# Altium PCB um3Supply.PcbDoc
Units mm, origin at the board's own origin, x right, y up, seen from the top; angles counter-clockwise.
Board outline 43 x 68 mm, 2 copper layers (Top Layer, Bottom Layer); 60 components, 30 nets, 167 pads, 9 vias.
Unrouted connection lines stored in the file: 38.
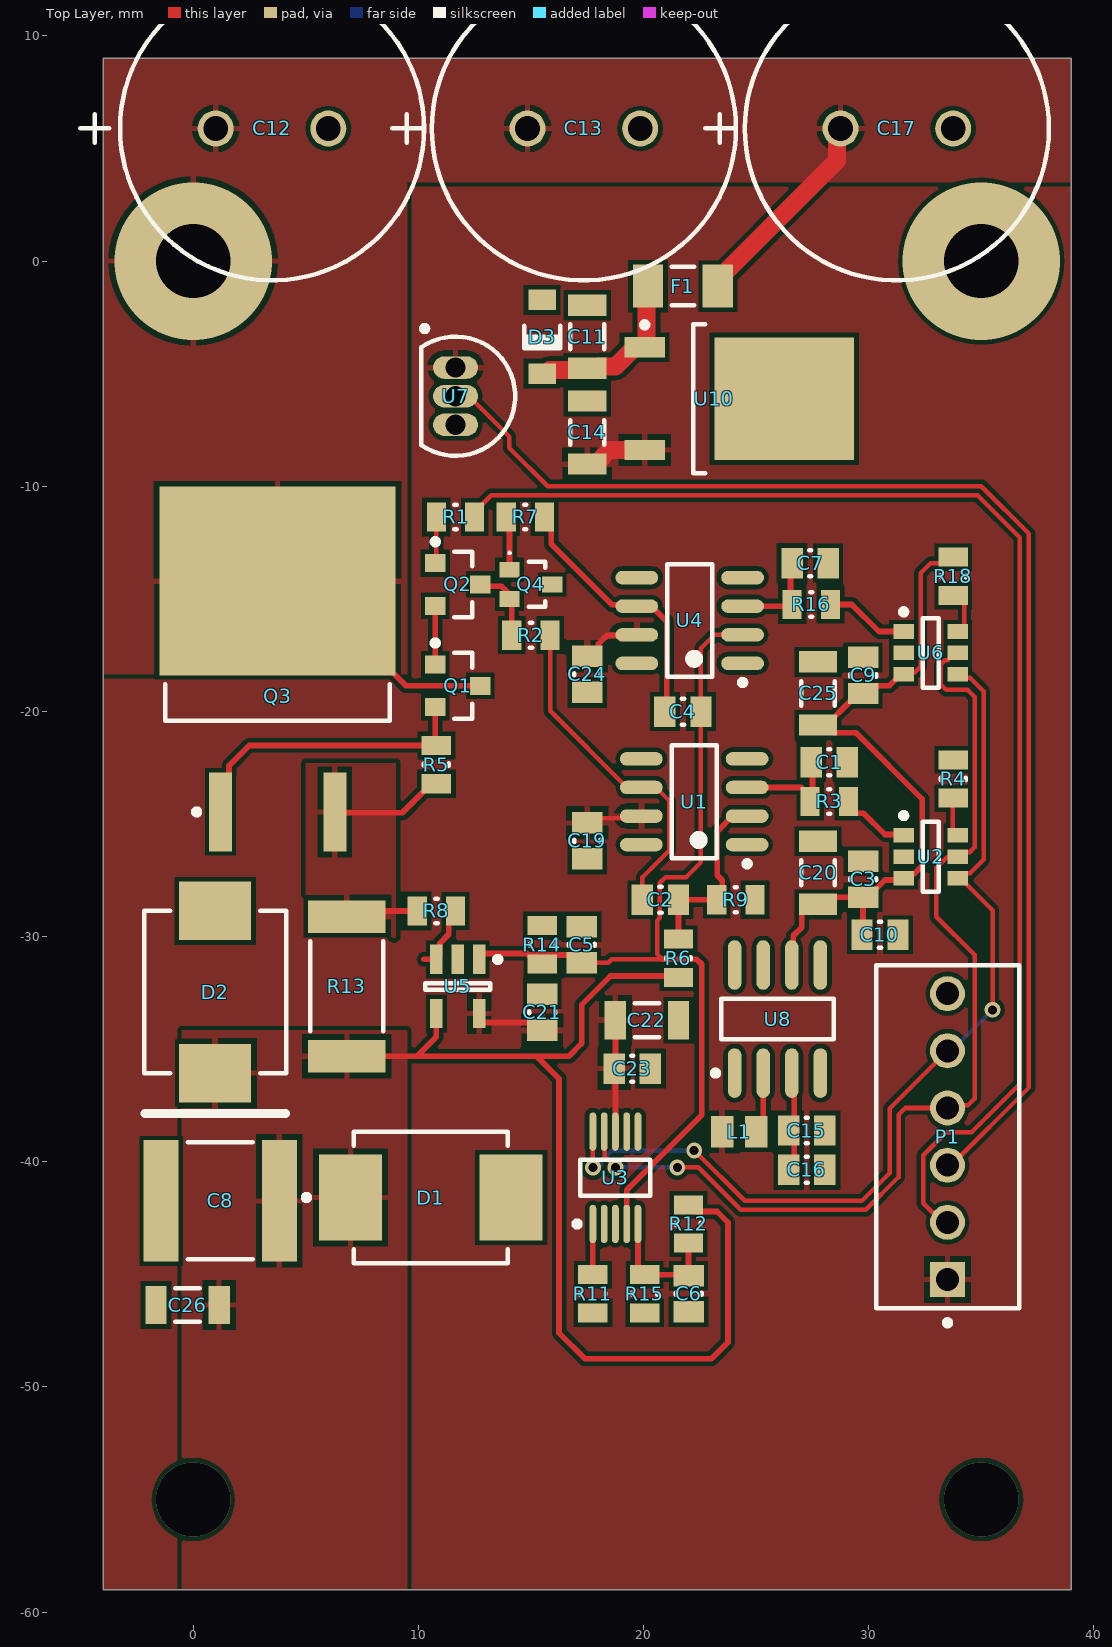
[diagram p0: Top Layer view]
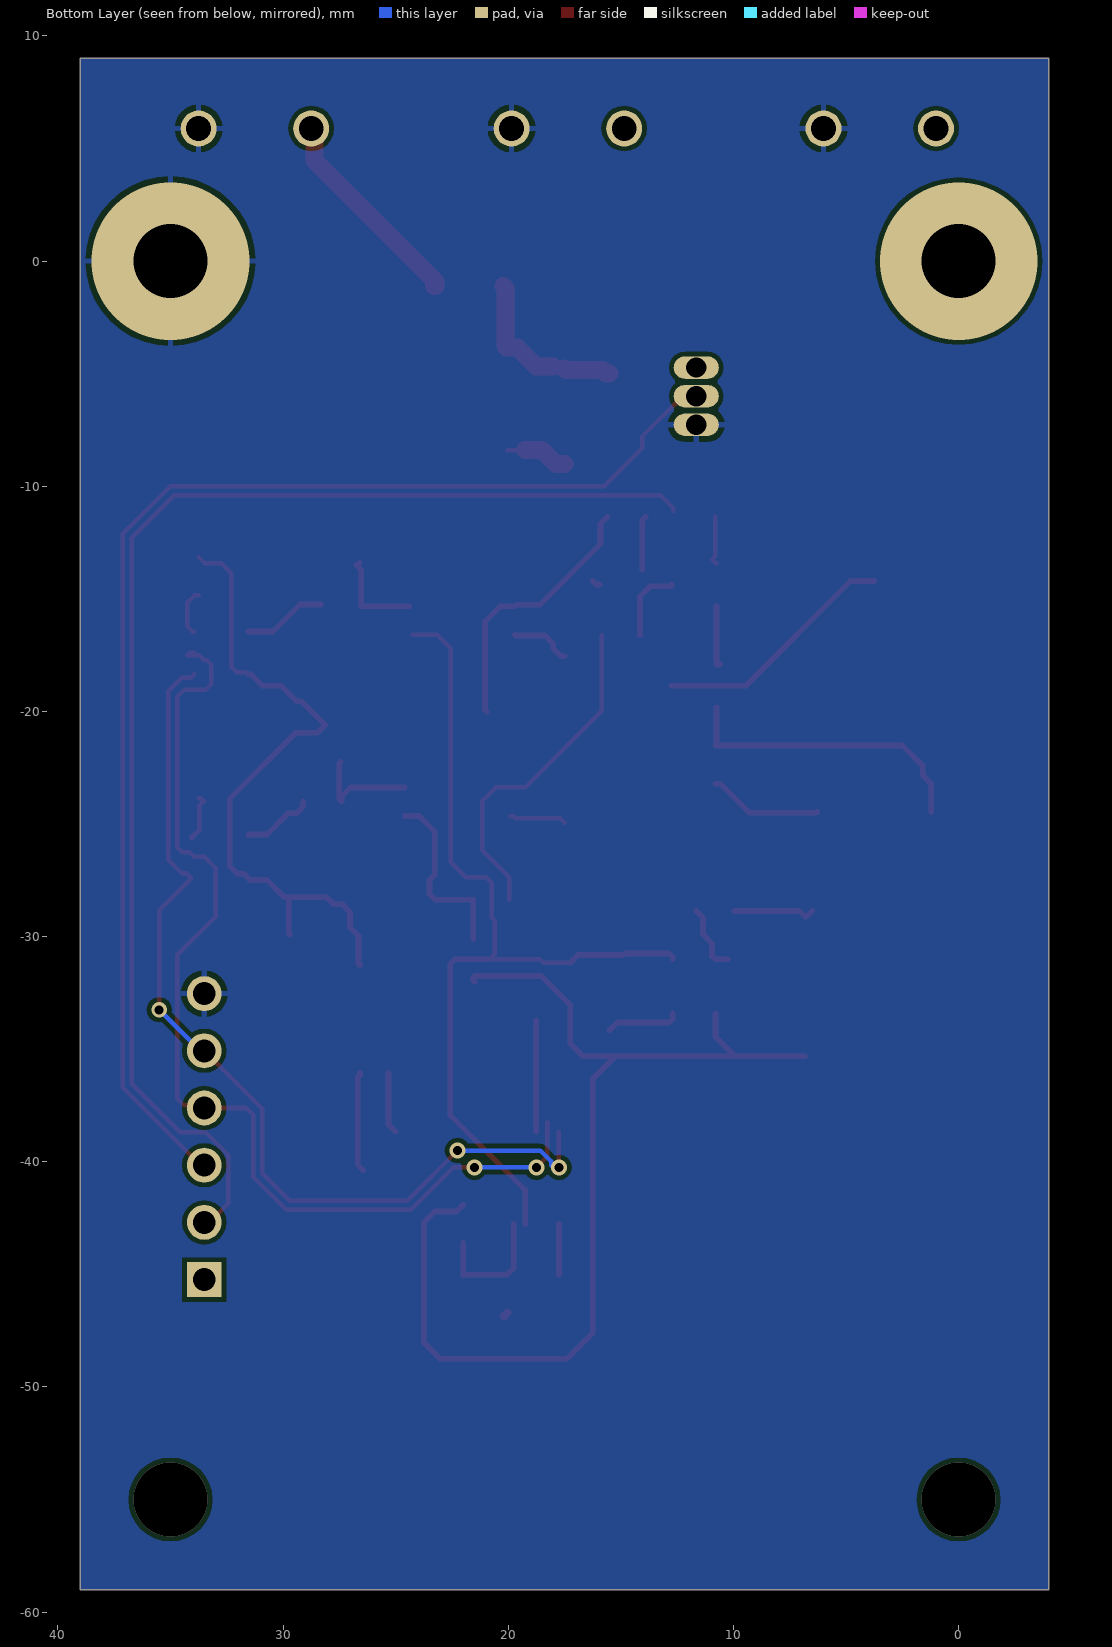
[diagram p1: Bottom Layer view, seen from below]

## Layer stack, top to bottom
Top Solder: solder mask 0.0102, Solder Resist, Dk 3.5
Top Layer: signal copper 0.0356
Dielectric 1: dielectric 0.32, FR-4, Dk 4.8
Bottom Layer: signal copper 0.0356
Bottom Solder: solder mask 0.0102, Solder Resist, Dk 3.5

## Board outline
-4,-59 39,-59 39,9 -4,9

## Design rules (kind name [scope] priority, off if disabled: settings)
Clearance [All] p1: gap=0.2 ignorepadtopadclearanceinfootprint=FALSE
PolygonConnect [All] p1: connectstyle=Relief reliefconductorwidth=0.254 reliefentries=4 polygonreliefangle="90 Angle" airgapwidth=0.254
RoomDefinition um3Supply [InComponentClass('um3Supply')] p1: confinementstyle=ConfineIn formatcopy=TRUE lockcomponents=FALSE outline 138.943,-96.729 578.871,-96.729 578.871,-76.409 138.943,-76.409
RoutingVias [All] p1: holewidth=0.4 width=0.7 viastyle="Through Hole" minholewidth=0.4 minwidth=0.7 maxholewidth=10 maxwidth=10
SolderMaskExpansion [All] p1: expansion=0.102
Width [All] p1: maxlimit=10 minlimit=0.2 preferedwidth=0.2
30 further rules are at their usual default settings.

## Components (designator, comment, footprint, x,y, rotation, side; value= is the part's Value field where it differs from the comment)
C1 "tbd" CAPC0805(2012)100_L 28.25,-22.25 r180 top value=1uF
C2 "tbd" CAPC0805(2012)100_L 20.75,-28.363 r0 top value=1uF
C3 "1uF" CAPC0805(2012)100_L 29.75,-27.453 r270 top
C4 "tbd" CAPC0805(2012)100_L 21.75,-20.013 r0 top value=1uF
C5 "tbd" CAPC0805(2012)100_L 17.25,-30.363 r90 top value=1uF
C6 "tbd" CAPC0805(2012)100_L 22,-45.863 r270 top value=1uF
C7 "tbd" CAPC0805(2012)100_L 27.4,-13.413 r180 top value=1uF
C8 "MOV" CAPC2220(5750)230_N 1.2,-41.738 r0 top value=22nF
C9 "1uF" CAPC0805(2012)100_L 29.75,-18.403 r270 top
C10 "1uF" CAPC0805(2012)100_L 30.5,-29.918 r180 top
C11 "CAP 10uF 10V 1206(3216)" CAPC1206(3216)130_L 17.5,-3.363 r270 top value=10uF
C12 "alum" PNSC-NF-A_V 3.5,5.887 r0 top
C13 "alum" PNSC-NF-A_V 17.35,5.887 r0 top
C14 "CAP 10uF 10V 1206(3216)" CAPC1206(3216)130_L 17.5,-7.613 r270 top value=10uF
C15 "1uF" CAPC0805(2012)100_L 27.25,-38.613 r180 top
C16 "1uF" CAPC0805(2012)100_L 27.25,-40.362 r180 top
C17 "alum" PNSC-NF-A_V 31.25,5.887 r0 top
C19 "1uF" CAPC0805(2012)100_L 17.5,-25.75 r90 top
C20 "CAP 10uF 10V 1206(3216)" CAPC1206(3216)130_L 27.75,-27.168 r270 top value=10uF
C21 "1uF" CAPC0805(2012)100_L 15.5,-33.363 r270 top
C22 "CAP 10uF 10V 1206(3216)" CAPC1206(3216)130_L 20.15,-33.713 r180 top value=10uF
C23 "1uF" CAPC0805(2012)100_L 19.5,-35.863 r180 top
C24 "1uF" CAPC0805(2012)100_L 17.5,-18.353 r90 top
C25 "CAP 10uF 10V 1206(3216)" CAPC1206(3216)130_L 27.75,-19.203 r270 top value=10uF
C26 "CAP 10uF 10V 1206(3216)" CAPC1206(3216)130_L -0.25,-46.363 r0 top value=10uF
D1 "MBRS4201T3" ONSC-SMC-2-403-03_V 10.55,-41.588 r0 top
D2 "SMCJ24A" FAIR-DO-214AB-2_V 0.975,-32.463 r270 top
D3 "MMSD4148T3G" ONSC-SOD123-2-425G-04_V 15.5,-3.363 r90 top
F1 "PTC" RESC1206(3216)_M 21.75,-1.113 r0 top value="499000.00 Ohm"
L1 "FBMJ2125HM210NT" INDC2013X105X50LL20T30 24.25,-38.663 r180 top
P1 "22-23-2061" MOLX-22-23-2061_V 33.5,-38.883 r90 top
Q1 "BC817" ONSC-SOT-23-3-318-08_V 11.75,-18.863 r0 top
Q2 "BC817" ONSC-SOT-23-3-318-08_V 11.75,-14.363 r0 top
Q3 "STB13007DT4" ONSC-D2PAK-3-418B-04_V 3.75,-18.113 r90 top
Q4 "BC807" ONSC-SC-70-3-419-04_V 15,-14.363 r0 top
R1 "220" RESC0805(2012)_L 11.65,-11.363 r0 top value="100.00 Ohm"
R2 "220" RESC0805(2012)_L 15,-16.613 r180 top value="100.00 Ohm"
R3 "220" RESC0805(2012)_L 28.25,-24 r180 top value="100.00 Ohm"
R4 "tbd" RESC0805(2012)_L 33.75,-23 r270 top value="100.00 Ohm"
R5 "tbd" RESC0805(2012)_L 10.8,-22.363 r90 top value="100.00 Ohm"
R6 "tbd" RESC0805(2012)_L 21.55,-30.963 r270 top value="100.00 Ohm"
R7 "220" RESC0805(2012)_L 14.75,-11.363 r0 top value="100.00 Ohm"
R8 "tbd" RESC0805(2012)_L 10.8,-28.863 r0 top value="100.00 Ohm"
R9 "tbd" RESC0805(2012)_L 24.1,-28.363 r0 top value="100.00 Ohm"
R11 "tbd" RESC0805(2012)_L 17.75,-45.863 r90 top value="100.00 Ohm"
R12 "tbd" RESC0805(2012)_L 22,-42.763 r90 top value="100.00 Ohm"
R13 "0.010Ohm 3W" RESC2512(6432)_M 6.825,-32.213 r90 top value="8660000.00 Ohm"
R14 "tbd" RESC0805(2012)_L 15.5,-30.363 r270 top value="100.00 Ohm"
R15 "tbd" RESC0805(2012)_L 20.05,-45.863 r90 top value="100.00 Ohm"
R16 "220" RESC0805(2012)_L 27.45,-15.25 r180 top value="100.00 Ohm"
R18 "tbd" RESC0805(2012)_L 33.75,-14 r270 top value="100.00 Ohm"
U1 "ADA4891" ADI-R-8_L 22.25,-24.013 r180 top
U2 "MCP4725A2T-E/CH" SOT-23-CH6_L 32.75,-26.453 r0 top
U3 "ADS1013IDGST" TI-DGS10_N 18.75,-40.713 r90 top
U4 "ADA4891" ADI-R-8_L 22.05,-15.963 r180 top
U5 "LT6106" LT-S5-5-TSOT-23_N 11.75,-32.213 r270 top
U6 "MCP4725A2T-E/CH" SOT-23-CH6_L 32.75,-17.403 r0 top
U7 "MCP9700-E/TO" TO-92-TO3 11.65,-6 r180 top
U8 "REF195GSZ" ADI-R-8_N 25.95,-33.663 r90 top
U10 "L78M05CDT-TR" TO-252_L 24.25,-6.112 r0 top

## Footprints (in the part's own frame and the unit in brackets; to place one, negate y for a bottom-side part, rotate by r counter-clockwise, add the part's x,y. Pads: shape width x height; smd on the part's side, far side on the other; paste and mask are expansions set on the pad)
ADI-R-8_L [mm] "SOIC, 8-Leads, Body 4.9x3.9mm, Pitch 1.27mm, IPC High Density"
  oval 1.9x0.6 smd: 1(-2.35,1.905) 2(-2.35,0.635) 3(-2.35,-0.635) 4(-2.35,-1.905) 5(2.35,-1.905) 6(2.35,-0.635) 7(2.35,0.635) 8(2.35,1.905)
  silkscreen extent -2.48,-2.5 1,2.88, body extent -2,-2.5 2,2.5, height 1.75
ADI-R-8_N [mm] "SOIC, 8-Leads, Body 4.9x3.9mm, Pitch 1.27mm, IPC Medium Density"
  oval 2.2x0.6 smd: 1(-2.4,1.905) 2(-2.4,0.635) 3(-2.4,-0.635) 4(-2.4,-1.905) 5(2.4,-1.905) 6(2.4,-0.635) 7(2.4,0.635) 8(2.4,1.905)
  silkscreen extent -2.52,-2.5 0.9,2.88, body extent -2,-2.5 2,2.5, height 1.75
CAPC0805(2012)100_L [mm] "Chip Capacitor, Body 2.0x1.2mm, Height 1.0mm, IPC High Density"
  rect 0.95x1.35 smd: 1(-0.8,0) 2(0.8,0)
  silkscreen extent -0.05,-0.58 0.05,0.58, body extent -1.1,-0.72 1.1,0.72, height 1
CAPC1206(3216)130_L [mm] "Chip Capacitor, Body 3.2x1.6mm, Height 1.3mm, IPC High Density"
  rect 0.95x1.7 smd: 1(-1.4,0) 2(1.4,0)
  silkscreen extent -0.55,-0.75 0.55,0.75, body extent -1.7,-0.9 1.7,0.9, height 1.3
CAPC2220(5750)230_N [mm] "Chip Capacitor, Body 5.7x5.0mm, Height 2.3mm, IPC Medium Density"
  rect 1.55x5.4 smd: 1(-2.625,0) 2(2.625,0)
  silkscreen extent -1.45,-2.6 1.45,2.6, body extent -3.05,-2.7 3.05,2.7, height 2.3
FAIR-DO-214AB-2_V [mm] "Molded Diode, 2-Leads, Body 7.15x6.25mm"
  rect 2.6x3.2 smd: 1(-3.6,0) 2(3.6,0)
  silkscreen extent -3.6,-3.15 5.4,3.15, body extent -3.79,-3.13 3.79,3.13, height 2.65
INDC2013X105X50LL20T30 [mm] "Chip Inductor, 2-Leads, Body 2.2x1.45mm, IPC High Density"
  rect 0.99x1.39 smd: 1(-0.755,0) 2(0.755,0)
  body extent -1.1,-0.72 1.1,0.72, height 1.05
LT-S5-5-TSOT-23_N [mm] "SOT23, 5-Leads, Body 2.90x1.63mm, Pitch 0.95mm, IPC Medium Density"
  rect 1.3x0.55 smd: 1(-1.2,0.95) 2(-1.2,0) 3(-1.2,-0.95) 4(1.2,-0.95) 5(1.2,0.95)
  silkscreen extent -1.32,-1.45 0.15,1.9, body extent -0.87,-1.45 0.87,1.45, height 0.01
MOLX-22-23-2061_V [mm] "THD, 6-Leads, Body 15.24x6.35mm, Pitch 2.54mm"
  rect 1.55x1.55 hole 1.02: 1(-6.35,0)
  round 1.55 hole 1.02: 2(-3.81,0) 3(-1.27,0) 4(1.27,0) 5(3.81,0) 6(6.35,0)
  silkscreen extent -8.39,-3.18 7.62,3.18, body extent -7.54,-3.25 7.54,3.1, height 10.67
ONSC-D2PAK-3-418B-04_V [mm] "DPAK, 3-Leads, Body 9.97x9.145mm, Pitch 2.54mm"
  rect 3.504x1.016 smd: 1(-6.35,2.54) 3(-6.35,-2.54)
  rect 8.38x10.49 smd: 4(3.9,0)
  silkscreen extent -6.47,-4.98 -0.69,4.98, body extent -2.3,-4.98 6.85,4.98, height 4.83
ONSC-SC-70-3-419-04_V [mm] "SOT23, 3-Leads, Body 2x1.25mm, Pitch 0.65mm"
  rect 0.9x0.7 smd: 1(-0.95,0.65) 2(-0.95,-0.65) 3(0.95,0)
  silkscreen extent -1,-1 0.63,1.45, body extent -0.63,-1 0.63,1, height 1
ONSC-SMC-2-403-03_V [mil] "Molded, 2-Leads, Body 6.86x5.84mm"
  rect 110x150 smd: 1(-140.49,0) 2(140.49,0)
  silkscreen extent -222,-115 135,115, body extent -135,-115 135,115, height 99
ONSC-SOD123-2-425G-04_V [mm] "SOD123, 2-Leads, Body 2.69x1.6mm, Height 1.35mm"
  rect 0.915x1.22 smd: 1(-1.637,0) 2(1.637,0)
  silkscreen extent -0.5,-0.8 0.5,0.8, body extent -1.35,-0.8 1.35,0.8, height 1.35
ONSC-SOT-23-3-318-08_V [mm] "SOT23, 3-Leads, Body 2.92x1.3mm, Pitch 0.95mm"
  rect 0.9x0.8 smd: 1(-1,0.95) 2(-1,-0.95) 3(1,0)
  silkscreen extent -1.12,-1.46 0.65,2.02, body extent -0.65,-1.46 0.65,1.46, height 1.11
PNSC-NF-A_V [mm] "THD, 2-Leads, Dia 13.5mm"
  round 1.6 hole 1.1: 1(-2.5,0) 2(2.5,0)
  silkscreen extent -8.51,-6.75 6.75,6.75, body extent -6.75,-6.75 6.75,6.75, height 11.5
RESC0805(2012)_L [mm] "Chip Resistor, Body 2.0x1.3mm, IPC High Density"
  rect 0.85x1.3 smd: 1(-0.85,0) 2(0.85,0)
  silkscreen extent -0.05,-0.55 0.05,0.55, body extent -1.1,-0.67 1.1,0.68, height 0.7
RESC1206(3216)_M [mm] "Chip Resistor, Body 3.2x1.6mm, IPC Low Density"
  rect 1.35x1.9 smd: 1(-1.55,0) 2(1.55,0)
  silkscreen extent -0.5,-0.85 0.5,0.85, body extent -1.67,-0.87 1.67,0.87, height 0.75
RESC2512(6432)_M [mm] "Chip Resistor, Body 6.4x3.2mm, IPC Low Density"
  rect 1.45x3.45 smd: 1(-3.1,0) 2(3.1,0)
  silkscreen extent -2,-1.63 2,1.63, body extent -3.25,-1.7 3.25,1.7, height 0.75
SOT-23-CH6_L [mm] "SOT23, 6-Leads, Body 2.9x1.7mm, Pitch 0.95mm, Lead Span 2.8mm, IPC High Density"
  rect 0.9x0.65 smd: 1(-1.2,0.95) 2(-1.2,0) 3(-1.2,-0.95) 4(1.2,-0.95) 5(1.2,0) 6(1.2,0.95)
  silkscreen extent -1.32,-1.55 0.35,1.95, body extent -0.9,-1.55 0.9,1.55, height 1.45
TI-DGS10_N [mm] "SOP, 10-Leads, Body 3x3mm, Pitch 0.5mm, IPC Medium Density"
  oval 1.7x0.3 smd: 1(-2.05,1) 2(-2.05,0.5) 3(-2.05,0) 4(-2.05,-0.5) 5(-2.05,-1) 6(2.05,-1) 7(2.05,-0.5) 8(2.05,0) 9(2.05,0.5) 10(2.05,1)
  silkscreen extent -2.17,-1.55 0.8,1.82, body extent -1.55,-1.55 1.55,1.55, height 1.1
TO-92-TO3 [mm] "TO, Flat Index; 3 In-Line, Axial Leads; Body Dia. 4.8mm; Leads 0.56 x 0.53 mm (max)"
  oval 2x1 hole 0.9: 1(0,-1.27) 2(0,0) 3(0,1.27)
  silkscreen extent -2.65,-3.13 1.52,2.65, body extent -2.65,-2.66 1.52,2.66, height 5.33
TO-252_L [mm] "D-PAK, 4-Leads, Body 6.1x6.5mm, Pitch 2.28mm, Lead Span 9.7mm, IPC High Density"
  rect 1.8x0.9 smd: 1(-4.2,2.28) 3(-4.2,-2.28)
  rect 6.2x5.45 smd: 4(2,0)
  silkscreen extent -4.32,-3.3 -1.5,3.4, body extent -2.05,-3.3 4.15,3.3, height 2.4

## Part data
C1 C2 C3 C4 C5 C6 C7 C9 C10 C15 C16 C19 C21 C23 C24: library part CMP-1036-04734-1, "CAP 1uF 6.3V ±20% 0805 (2012 Metric) Thickness 1mm SMD", Case-EIA=0805, Case-Metric=2012, Rated Voltage="6.3 V", Tolerance=±20%, Max Thickness="1 mm", Technology=SMT
C8: library part CMP-1042-00392-1, Case-EIA=2220, Case-Metric=5750, Rated Voltage="200 V", Tolerance=±20%, Max Thickness="2.3 mm", Technology=SMT
C11 C14 C20 C22 C25 C26: library part CMP-1037-04970-1, "CAP 10uF 10V -20% to +80% 1206 (3216 Metric) Thickness 1.3mm SMD", Case-EIA=1206, Case-Metric=3216, Rated Voltage="10 V", Tolerance="-20% to +80%", Max Thickness="1.3 mm", Technology=SMT
C12 C13 C17: library part CMP-2000-06196-1, "5mm lead pitch", Capacitance=0.22F, Manufacturer=Panasonic, Maximum Operating Temperature=+70°C, Minimum Operating Temperature=-25°C, Package Description="2-Pin Through Hole Device, Dia 13.5 mm", Package Reference=NF-A, Tolerance=-20?+80%, Tolerance Minus=-20%, Tolerance Plus=+80%, Voltage=5.5Vdc, Datasheet URL=https://industrial.panasonic.com/cdbs/www-data/pdf/RDG0000/ABC0000C90.pdf, Datasheet Version=08/2016, Depth=7.5mm, Diameter=13.5mm, Dimensions=13.5(Dia.)x7.5mm, Height=7.5mm, Lead Diameter=0.8mm, Lead Pitch=5mm, Lifetime=1000h, Manufacturer URL=http://www.panasonic.com/, Mounting Technology=ThroughHole, Mounting Type=ThroughHole, Series=NF, Terminal Type=ThroughHole
D1: library part CMP-1055-00388-1, "200 V, 4 A Schottky Fast Soft-Recovery Power Rectifier, 2-Pin SMC, Tape and Reel", Manufacturer="On Semiconductor", ComponentLink1Description="Manufacturer URL", ComponentLink1URL=http://www.onsemi.com/, ComponentLink2Description=Datasheet, ComponentLink2URL=http://www.onsemi.cn/pub_link/Collateral/MBRS4201T3-D.PDF, ComponentLink3Description="Package Specification", ComponentLink3URL=http://www.onsemi.com/pub_link/Collateral/403-03.PDF, Configuration=Single, DatasheetVersion="Rev. 5", IFSM Max (A)=100, Mounting Technology="Surface Mount", PackageDescription="2-Pin Small Molded Package, J-Bend Lead, Body 5.845 x 6.855 mm", PackageReference=SMC-2-403-03, PackageVersion="Rev. E, 08/2005", Packing="Tape and Reel", PartNumber=MBRS4201T3, RoHS=FALSE, trr Max (ns)=35
D2: library part CMP-2000-07104-1, "Transient Voltage Suppressor, 1500 W, 24 V, 2-Pin SMD, RoHS, Tape and Reel", Manufacturer=FairchildSemiconductor, Maximum Clamping Voltage=38.9V, Maximum Peak Pulse Current=38.6A, Maximum Reverse Leakage Current=5uA, Maximum Reverse Stand-off Voltage=24V, Minimum Breakdown Voltage=26.7V, Operating Temperature=-55to150°C, Package=2DO-214AB, Package Description="2-Pin Surface Mount Device, Body 6.875 x 5.9 mm", Package Reference=DO-214AB, Peak Pulse Power Dissipation=1500W, Test Current=1mA, Category=TVS, Configuration=Single, Datasheet URL=https://www.fairchildsemi.com/datasheets/SM/SMCJ24A.pdf, Datasheet Version="Rev. 5.7, 09/2015", Direction Type=Uni-Directional, Manufacturer URL=https://www.fairchildsemi.com/, Mounting=SurfaceMount, Mounting Technology=SurfaceMount, Packaging=Tape&Reel, Rad Hard=No
D3: library part CMP-0895-00002-1, "Switching Diode, 100 V, 200 mA, -55 to 150 degC, 2-Pin SOD123 (425), RoHS, Tape and Reel", Manufacturer="ON Semiconductor", Temperature Range="-55 to 150 degC", CD (Max)="4 pF", ComponentLink1Description="Manufacturer URL", ComponentLink1URL=http://www.onsemi.com/, ComponentLink2Description=Datasheet, ComponentLink2URL=http://www.onsemi.com/pub_link/Collateral/MMSD4148T1-D.PDF, ComponentLink3Description="Package Specification", ComponentLink3URL=http://www.onsemi.com/pub_link/Collateral/425-04.PDF, DatasheetVersion="Rev. 11", IR @ VR="75 V (Max)=50 uA", Mounting Technology="Surface Mount", PackageDescription="2-Pin SOD123, Body 2.69 x 1.6 mm, Height 1.35 mm", PackageReference=SOD123-2-425G-04, PackageVersion="Rev. 04G", Packing="Tape and Reel", PartNumber=MMSD4148T3G, PD (Max)="425 mW", RoHS=TRUE, Trr (Max)="4 ns", VBR (Min)="100 V", VF (Max)="1 A"
F1: library part CMP-1014-00815-1, "Fuse", Case-EIA=1206, Case-Metric=3216, Power="0.25 W", Tolerance="1 %", Technology=SMT
L1: library part CMP-1660-00003-1, "Chip Inductor, 21 Ohm, +/- 30%, 6 A, -40 to 125 degC, 0805 (2012 Metric), RoHS, Tape and Reel", Case\Package=0805, Case Code (Metric)=2012, Current Rating="6 A", Max Operating Temperature="125 degC", Min Operating Temperature="-40 degC", Package Quantity=1, Resistance="4 mohm", Tolerance=30%, Case Code (Imperial)=0805, ComponentLink1Description="Manufacturer URL", ComponentLink1URL=http://www.t-yuden.com/, ComponentLink2Description=Datasheet, ComponentLink2URL=http://ds.yuden.co.jp/TYCOMPAS/ut/detail.do?productNo=FBMJ2125HM210NT&fileName=FBMJ2125HM210NT_SS&mode=specSheetDownload, Core Material=Ferrite, DatasheetVersion=08/2016, Height="0.85 mm", Impedance="21 Ohm", Length="2 mm", Max Current Rating="6 A", Mount="Surface Mount", Mounting Technology="Surface Mount", PackageDescription="2-Pin Surface Mount Device, Body 2 x 1.25 mm", PackageReference=0805, Packaging="Tape and Reel", REACH SVHC=Unknown, RoHSCompliant=true, Width="1.25 mm"
P1: library part CMP-2000-05536-1, "Male Header, Pitch 2.54 mm, 1 x 6 Position, Height 10.67 mm, Tail Length 3.56 mm, 0 to 70 degC, RoHS, Bulk", Current Rating=4A, Manufacturer=Molex, Package Description="Male Header, Pitch 2.54 mm, 1 x 6 Position, Height 10.67 mm, Tail Length 3.56 mm", Voltage Rating=250V, =002223206122-23-2061-PBA-6373-06A102, Brand=Molex, Contact Material=Brass, Contact Plating=Tin, Datasheet URL=https://datasheet.ciiva.com/19460/232303-19460895.pdf, Datasheet Version="Rev. P, 09/2001", Factory Pack Quantity=1000, Housing Material=Nylon, Manufacturer URL=http://www.molex.com/, Mounting Angle=Vertical, Mounting Style=ThroughHole, Mounting Technology=ThroughHole, Number of Positions=6, Number of Positions / Contacts=6, Number of Rows=1, Package Reference=22-23-2061, Packaging=Bulk, Pitch=2.54mm, Product Category=.100K.K.Connectors, Product Type=Headers, RoHS=Details, Series=6373, Termination Style=ThroughHole, Tradename=KK, Type=PinStrip
Q1 Q2: library part CMP-1048-00736-1, "General Purpose Transistor, NPN Silicon, 3-Pin SOT-23, Pb-Free, Tape and Reel", Manufacturer="On Semiconductor", PartNumber=BC817-16LT1G, ComponentLink1Description="Manufacturer URL", ComponentLink1URL=http://www.onsemi.com/, ComponentLink2Description=Datasheet, ComponentLink2URL=http://www.onsemi.com/pub_link/Collateral/BC817-16LT1-D.PDF, ComponentLink3Description="Package Specification", ComponentLink3URL=http://www.onsemi.cn/pub_link/Collateral/318-08.PDF, DatasheetVersion="Rev. 12", fT Min (MHz)=100, IC Continuous (A)=0.5, Mounting Technology="Surface Mount", PackageDescription="3-Pin Small Outline Transistor, Body 2.92 x 1.3 mm, Pitch 0.95 mm", PackageReference=SOT-23-3-318-08, PackageVersion="Rev. AP, 11/2009", Packing="Tape and Reel", Polarity=NPN, RoHS=TRUE
Q3: library part CMP-1048-00099-1, "Bipolar (BJT) Transistor NPN 400V 8A 80W Surface Mount D2PAK", Manufacturer="On Semiconductor", PartNumber=NJVMJB41CT4G, ComponentLink1Description="Manufacturer URL", ComponentLink1URL=http://www.onsemi.com/, ComponentLink2Description=Datasheet, ComponentLink2URL=http://www.onsemi.com/pub_link/Collateral/MJB41C-D.PDF, ComponentLink3Description="Package Specification", ComponentLink3URL=http://www.onsemi.com/pub_link/Collateral/418B-04.PDF, DatasheetVersion="Rev. 4", fT Min (MHz)=3, IC Continuous (A)=6, Mounting Technology="Surface Mount", PackageDescription="3-Pin Flange Mount, Body 9.145 x 9.97 mm, Pitch 2.54 mm", PackageReference=D2PAK-3-418B-04, PackageVersion="Rev. K, 09/2008", Packing="Tape and Reel", Polarity=NPN, RoHS=TRUE
Q4: library part CMP-1048-00340-1, "General Purpose Transistor, PNP Silicon, 3-Pin SC70, Pb-Free, Tape and Reel", Manufacturer="On Semiconductor", PartNumber=BC807-40WT3G, ComponentLink1Description="Manufacturer URL", ComponentLink1URL=http://www.onsemi.com/, ComponentLink2Description=Datasheet, ComponentLink2URL=http://www.onsemi.com/pub_link/Collateral/BC807-25W-D.PDF, ComponentLink3Description="Package Specification", ComponentLink3URL=http://www.onsemi.cn/pub_link/Collateral/419-04.PDF, DatasheetVersion="Rev. 3", fT Min (MHz)=100, IC Continuous (A)=-0.5, Mounting Technology="Surface Mount", Note1=0, PackageDescription="3-Pin Small Outline Transistor, Body 2 x 1.25 mm, Pitch 0.65 mm", PackageReference=SC-70-3-419-04, PackageVersion="Rev. N, 11/2008", Packing="Tape and Reel", Polarity=PNP, RoHS=TRUE
R1 R2 R3 R4 R5 R6 R7 R8 R9 R11 R12 R14 R15 R16 R18: library part CMP-1013-00397-1, Case-EIA=0805, Case-Metric=2012, Power="0.125 W", Tolerance="1 %", Technology=SMT
R13: library part CMP-1018-00955-1, Case-EIA=2512, Case-Metric=6432, Power="1 W", Tolerance="1 %", Technology=SMT
U1 U4: library part CMP-0384-01118-1, "ADA4891-1ARZ-R7, Single Channel Single-Supply Operation Operational Amplifier, 240 MHz BW, 170 V/us SR, Industrial, 8-pin SOIC (R-8), Reel", Amplifiers Per Package=1, Generic Part Number=ADA4891-1, Input Bias Current=2pA, Input Offset Voltage=2.5mV, Manufacturer="Analog Devices", PartNumber=ADA4891-1ARZ-R7, Code_JEDEC=MS-012-AA, ComponentLink1Description="Manufacturer URL", ComponentLink1URL=http://www.analog.com/en/index.html, ComponentLink2Description=Datasheet, ComponentLink2URL=http://www.analog.com/static/imported-files/data_sheets/ADA4891-1_4891-2_4891-3_4891-4.PDF, ComponentLink3Description="Package Specification", ComponentLink3URL=http://www.analog.com/static/imported-files/packages/PKG_PDF/SOIC_Narrow%20(R)/R_8.pdf, DatasheetVersion="Rev. D", Iq/Amp=4.4mA, Mounting Technology="Surface Mount", PackageDescription="8-Pin Standard Small Outline Package, Body 3.9 x 4.9 mm, Pitch 1.27 mm", PackageReference=R-8, PackageVersion=060506-A, Packing=Reel, PartId=1, Slew Rate=170V/us, Small Signal Bandwidth=240MHz, V Span Max=5.5V, V Span Min=2.7V
U2 U6: library part CMP-0188-00758-2, "12-Bit Digital-to-Analog Converter with EEPROM Memory in SOT-23-6, 6-Pin SOT-23, Extended Temperature, Tape and Reel", Code_IPC=SOT26A-6, ComponentLink1Description="Manufacturer URL", ComponentLink1URL=http://www.microchip.com/, ComponentLink2Description=Datasheet, ComponentLink2URL=http://ww1.microchip.com/downloads/en/DeviceDoc/22039d.pdf, ComponentLink3Description="Package Specification", ComponentLink3URL=http://www.microchip.com/stellent/groups/techpub_sg/documents/packagingspec/en012702.pdf, DatasheetVersion="revD, Jun-2009", PackageDescription="6-Lead Plastic Small Outline Transistor (CH) [SOT-23]", PackageReference=SOT-23-CH6, PackageVersion="revBB, Aug-2009", RevisionNote="URLs added."
U3: library part CMP-0003-00389-2, "12-Bit ADC with Integrated Oscillator, and Reference, -40 to 125 degC, 10-pin SOP (DGS10), Green (RoHS & no Sb/Br)", Analog Voltage AV/DD(Max)(V)=5.5, Analog Voltage AV/DD(Min)(V)=2, Manufacturer="Texas Instruments", # Input Channels=1, Architecture=Delta-Sigma, Code_JEDEC=MO-153, ComponentLink1Description="Manufacturer URL", ComponentLink1URL=http://www.ti.com/, ComponentLink2Description=Datasheet, ComponentLink2URL=http://www.ti.com/general/docs/lit/getliterature.tsp?genericPartNumber=ADS1013&fileType=pdf, ComponentLink3Description="Package Specification", ComponentLink3URL=http://www.ti.com/lit/ml/mpds035b/mpds035b.pdf, DatasheetVersion=SBAS473C, Digital Supply(Max)(V)=5.5, Digital Supply(Min)(V)=2, Eco-Plan="Green (RoHS & no Sb/Br)", INL(Max)(+/-LSB)=0.5, Interface="Serial I2C", Mounting Technology="Surface Mount", PackageDescription="10-Pin Plastic Small Outline, Body 3 x 3 mm, Pitch 0.5 mm", PackageReference=DGS10, PackageVersion="4073272/C, 02/2004", PartNumber=ADS1013IDGST, Resolution(Bits)=12, Sample Rate (max)(SPS)=3.3k, SubFamily="Precision ADC (<=10MSPS)"
U5: library part CMP-0359-01871-1, "LT6106CS5#TRPBF, Single Channel, Low Cost, High Side Current Sense Operational Amplifier, 0.2 MHz Typical GBW, 5-Pin SOT-23 (S5-5), Commercial, Pb-Free, Reel", Manufacturer="Linear Technology", PartNumber=LT6106CS5#TRPBF, Channels (#)=1, Code_JEDEC=MO-193, ComponentLink1Description=Datasheet, ComponentLink1URL=http://cds.linear.com/docs/Datasheet/6106fa.pdf, ComponentLink2Description="Package Specification", ComponentLink2URL=http://cds.linear.com/docs/Packaging/SOT_5_05-08-1635.pdf, DatasheetVersion="Rev. A", GBW (MHz) Typical=0.2, Is (mA) Typical=0.06, Linear Technology Part Number=LT6106, Mounting Technology="Surface Mount", PackageDescription="5-Lead Plastic TSOT-23, Body 1.63 x 2.90 mm, Pitch 0.95 mm", PackageReference=LT-S5-5-TSOT-23, Packing=Reel, RoHS=Pb-Free, Type=CSA, Vos (mV) Guaranteed=0.25, Vos (mV) Typical=0.15, Vs Max (V)=36, Vs Min (V)=2.7
U7: library part CMP-0192-00001-1, "Low-Power Linear Active Thermistor IC, 3-Pin TO-92, Extended Temperature", DatasheetVersion="revE, Apr-2009", PackageDescription="3-Lead Plastic Transistor Outline (TO) [TO-92]", PackageReference=TO-92-TO3, PackageVersion="revBB, Aug-2009"
U8: library part CMP-0784-00123-1, Manufacturer="Analog Devices", Operating Temp Range="-40 to 85 degC", Code_JEDEC=MS-012-AA, ComponentLink1Description="Manufacturer URL", ComponentLink1URL=http://www.analog.com/en/index.html, ComponentLink2Description=Datasheet, ComponentLink2URL=http://www.analog.com/static/imported-files/data_sheets/REF19xSeries.pdf, ComponentLink3Description="Package Specification", ComponentLink3URL=http://www.analog.com/static/imported-files/packages/PKG_PDF/SOIC_Narrow%20(R)/R_8.pdf, ComponentLink4Description="URL Link1", ComponentLink4URL="Product URL:http://www.analog.com/en/special-linear-functions/voltage-references/ref195/products/product.html", DatasheetVersion="Rev. L", Mounting Technology="Surface Mount", PackageDescription="8-Pin Standard Small Outline Package, Body 4.9 x 3.9 mm, Pitch 1.27 mm", PackageReference=R-8, PackageVersion="060506-A, 06/2006", Packing=Tube, PartNumber=REF195GSZ, Ref Out TC (ppm/C)=10, Vout=5V
U10: library part CMP-0244-00178-1, "Positive Voltage Regulator, 5V, 3-Pin DPAK, Tape and Reel", ComponentLink1Description="Manufacturer URL", ComponentLink1URL=http://www.st.com, ComponentLink2Description=Datasheet, ComponentLink2URL=http://www.st.com/internet/com/TECHNICAL_RESOURCES/TECHNICAL_LITERATURE/DATASHEET/CD00000447.pdf, DatasheetVersion=1/11/2010, PackageDescription="3-Pin Transistor Outline Package 2.28 mm Pitch, 9.7 mm Lead Span (DPAK)", PackageReference=TO-252, PackageVersion=2011

## Via types
v1: diameter 0.7, hole 0.4, Top Layer to Bottom Layer, 5 vias
v2: diameter 3.3, hole 3.3, Top Layer to Bottom Layer, 2 vias
v3: diameter 7, hole 3.3, Top Layer to Bottom Layer, 2 vias

## Nets (pads, with @x,y where several pads share a name; then routed paths per layer and width w, separated by ;. In a path a pad name is that pad's centre, name@x,y a point inside that pad or via, vN(x,y) a via of type N, cw(c..) or ccw(c..) an arc to the next point about the centre after c; other vN are vias at no path point)
5V: C14.2 C19.2 C21.2 C22.2 C23.2 C24.2 L1.2 P1.1 U1.7 U3.8 U4.7 U5.5 U7.1 U10.3 | length 16.3
  Top Layer w0.2: C19.2 17.7,-24.75 19.667,-24.75 19.769,-24.648 U1.7 ; U10.3@19.25,-8.393 U10.3
  Top Layer w0.254: U5.5 12.7,-33.667 12.848,-33.815 15.152,-33.815 C21.2 ; C24.2 17.652,-17.553 18,-17.205 18,-17 18.369,-16.631 19.667,-16.631 U4.7 ; U3.8 C22.2
  Top Layer w0.8: C14.2 17.875,-9.013 18.495,-8.393 U10.3@19.25,-8.393
GND: C1.1 C3.1 C5.2 C6.2 C7.1 C8.1 C9.1 C10.1 C11.1 C12.2 C13.2 C14.1 C15.1 C16.1 C17.2 C19.1 C20.1 C21.1 C22.1 C23.1 C24.1 C25.1 C26.1 D1.2 D2.1 D3.2 P1.6 Q4.3 R4.1 R9.2 R11.1 R14.1 R15.1 U1.4 U2.2 U3.3 U4.4 U5.2 U6.2 U7.3 U8.4 U10.4 | length 0.6
  Top Layer w0.254: Q4.3 16.1,-14.363 Q4.3@16.25,-14.213
  Top Layer w0.381: R15.1 R15.1@20.2,-46.862
  other v3: 35,0
IOUT_MEAS: C4.2 C5.1 R14.2 U3.4 U4.2 U5.1 | length 40.5
  Top Layer w0.2: C5.1 18.436,-31.163 18.591,-31.007 20.83,-31.007 20.6,-30.776 20.6,-29.287 20.725,-29.162 20.725,-27.613 20.976,-27.362 21.888,-27.362 22.55,-26.7 C4.2 22.55,-17.2 23.15,-16.6 24.248,-16.6 U4.2@24.25,-16.598
  Top Layer w0.254: U5.1 12.7,-30.898 12.848,-30.75 14.819,-30.75 14.883,-30.815 16.902,-30.815 C5.1 ; U3.4 19.25,-41.25 22.581,-37.919 22.581,-31.23 22.358,-31.007 20.83,-31.007
NetC1_2: C1.2 R3.2 U1.3 | length 5
  Top Layer w0.254: U1.3 27.003,-23.378 27.4,-23.775 R3.2 27.5,-23.9 27.5,-22.3 C1.2
NetC2_1: C2.1 R2.1 U1.6 | length 15.2
  Top Layer w0.2: R2.1 15.85,-19.978 19.25,-23.378 U1.6 20.55,-23.378 21.15,-23.978 21.15,-26.166 19.95,-27.366 C2.1
NetC2_2: C2.2 R6.1 R9.1 U1.2 | length 8.3
  Top Layer w0.254: R6.1 C2.2 R9.1 23.495,-28.118 23.495,-27.5 23.269,-27.274 23.269,-25.329 23.95,-24.648 U1.2
NetC4_1: C4.1 R7.2 U4.6 | length 11.9
  Top Layer w0.254: R7.2 15.898,-11.661 15.898,-12.566 18.594,-15.261 19.634,-15.261 U4.6 20.35,-15.328 21.031,-16.009 21.031,-19.932 C4.1
NetC7_2: C7.2 R16.2 U4.3 | length 4.2
  Top Layer w0.254: U4.3 26.522,-15.328 26.522,-13.728 26.75,-13.5 26.687,-13.5 C7.2
NetC11_2: C11.2 D3.1 F1.1 U10.1 | length 7.3
  Top Layer w0.8: D3.1 15.653,-5 15.815,-4.837 17.425,-4.837 C11.2 ; C11.2@18,-4.676 18.756,-4.676 19.6,-3.832 U10.1 20.075,-3.832 20.125,-3.782 20.125,-1.188 F1.1
NetC15_2: C15.2 C16.2 L1.1 U8.2 U8.3 | length 7.2
  Top Layer w0.254: L1.1 25.315,-38.353 U8.2 ; C16.2 26.687,-40.125 26.687,-36.25 26.585,-36.148 U8.3
NetQ1_1: Q1.1 Q2.2 | length 2.8
  Top Layer w0.254: Q1.1 10.587,-17.913 10.75,-17.75 Q2.2
NetQ1_2: Q1.2 Q3.1 R5.2 | length 13.5
  Top Layer w0.254: Q3.1 1.21,-23.219 1.591,-22.838 1.591,-22.409 2.487,-21.513 R5.2 10.75,-21.463 Q1.2
NetQ2_1: Q2.1 R1.1 | length 2.2
  Top Layer w0.2: Q2.1 10.785,-13.413 10.948,-13.25 10.937,-13.25 10.8,-13.113 R1.1
NetQ2_3: Q2.3 Q4.2 R2.2 | length 3.4
  Top Layer w0.254: Q2.3 12.75,-14.444 13.694,-14.444 14.15,-14.9 R2.2
NetQ3_3: Q3.3 R5.1 R8.1 R13.2 | length 8.7
  Top Layer w0.254: Q3.3 6.327,-24.5 9.287,-24.5 10.575,-23.213 R5.1 ; R13.2@6.5,-28.863 6.75,-29.113 R13.2 7.075,-28.863 R8.1
NetQ4_1: Q4.1 R7.1 | length 2.4
  Top Layer w0.254: R7.1 14.05,-11.512 Q4.1
NetR3_1: R3.1 U2.1 | length 3.2
  Top Layer w0.254: R3.1 29.1,-24.225 29.398,-24.523 29.773,-24.523 30.719,-25.469 31.516,-25.469 U2.1
NetR4_2: R4.2 U2.6 | length 2.2
  Top Layer w0.2: R4.2 33.65,-23.85 33.5,-24 33.55,-24 33.725,-24.175 33.725,-25.278 U2.6
  Top Layer w0.254: U2.6 U2.6@34.05,-25.603
NetR8_2: R8.2 U5.3 | length 3.1
  Top Layer w0.254: 10.25,-31.013 U5.3 10.948,-30.865 10.948,-30.302 11.352,-29.898 11.352,-29.161 R8.2
NetR11_2: R11.2 U3.1 | length 2.2
  Top Layer w0.254: R11.2 U3.1
NetR16_1: R16.1 U6.1 | length 3.7
  Top Layer w0.254: R16.1 29.25,-15.25 30.453,-16.453 U6.1
NetR18_2: R18.2 U6.6 | length 2.1
  Top Layer w0.2: R18.2 33.925,-14.85 34.25,-15.175 34.25,-16.228 34.025,-16.453 U6.6
SCL: P1.5 U2.4 U3.10 U6.4 | length 42.6
  Top Layer w0.2: v1(17.75,-40.25) U3.10 ; v1(22.25,-39.5) 24.488,-41.738 29.7,-41.738 30.923,-40.515 30.923,-37.65 P1.5 P1.5@33.5,-35.052 ; U6.4 34.097,-18.5 34.5,-18.5 35.1,-19.1 35.1,-26.585 34.508,-27.177 34.3,-27.177 34.075,-27.403 35.5,-28.827 v1(35.5,-33.25)
  Bottom Layer w0.2: v1(17.75,-40.25) 18,-40.25 18.1,-40.15 18.1,-39.981 18.581,-39.5 v1(22.25,-39.5) ; P1.5 33.678,-35.073 v1(35.5,-33.25)
SDA: P1.4 U2.5 U3.9 U6.5 | length 46.9
  Top Layer w0.2: U3.9 18.25,-38.25 18.269,-38.269 18.269,-39.769 v1(18.75,-40.25) ; v1(21.5,-40.25) 22.434,-40.25 24.322,-42.138 29.866,-42.138 31.323,-40.68 31.323,-37.919 31.629,-37.613 P1.4 33.613,-37.5 34.397,-37.5 34.7,-37.197 34.7,-30.814 33,-29.114 33,-26.953 33.5,-26.453 U2.5 34.153,-26.25 34.483,-26.25 34.7,-26.033 34.7,-19.35 34.397,-19.047 33.445,-19.047 33.2,-18.802 33.2,-17.903 33.376,-17.728 33.5,-17.728 33.728,-17.5 34.25,-17.5 34.153,-17.403 U6.5
  Bottom Layer w0.2: v1(18.75,-40.25) v1(21.5,-40.25)
Shutdown: P1.2 R1.2 | length 58.6
  Top Layer w0.2: R1.2@12.662,-11.088 12.662,-10.975 13.237,-10.4 34.834,-10.4 36.717,-12.283 36.717,-36.535 34.565,-38.687 33.445,-38.687 32.425,-39.707 32.425,-41.838 33.28,-42.693 P1.2
TEMP: P1.3 U7.2 | length 57.9
  Top Layer w0.2: U7.2 12.25,-6 14.043,-7.793 14.043,-8.299 15.743,-10 35,-10 37.117,-12.117 37.117,-36.701 33.666,-40.153 P1.3
VIN: C12.1 C13.1 C17.1 F1.2 Q1.3 Q3.4 | length 20.3
  Top Layer w0.254: Q3.4 4.805,-14.213 9.455,-18.863 Q1.3
  Top Layer w0.8: F1.2 23.225,-1.113 23.225,-0.913 28.597,4.459 28.597,5.734 C17.1
  other v3: 0,0
VOUT: C8.2 C26.2 D1.1 D2.2 R6.2 R12.2 R13.1 U5.4 | length 48.1
  Top Layer w0.254: R13.1 9.937,-35.313 ; U5.4 10.8,-34.45 9.937,-35.313 ; R6.2@21.5,-32 21.55,-31.95 R6.2 21.487,-31.75 18.533,-31.75 17.25,-33.033 17.25,-34.75 16.687,-35.313 15.25,-35.313 ; R12.2 22.298,-42.211 23.261,-42.211 23.75,-42.7 23.75,-48.019 23.019,-48.75 17.397,-48.75 16.25,-47.603 16.25,-36.313 15.25,-35.313 ; 9.937,-35.313 15.25,-35.313
VOUT_MEAS: C6.1 R12.1 R15.2 U3.5 | length 5.8
  Top Layer w0.254: U3.5 19.75,-44.715 20.048,-45.013 R15.2 21.95,-45.013 C6.1 R12.1
VREF: C3.2 C9.2 C10.2 C20.2 C25.2 R18.1 U2.3 U6.3 U8.6 | length 30.1
  Top Layer w0.2: U6.3 31.653,-18.25 32.066,-18.25 32.3,-18.016 32.3,-13.863 32.75,-13.413 33.487,-13.413 R18.1
  Top Layer w0.254: U8.6 26.651,-31.196 26.651,-29.966 27.027,-29.591 27.027,-28.916 27.375,-28.568 C20.2 28.065,-28.253 C3.2 ; C10.2 29.75,-29.868 C3.2 ; U6.3 31.425,-18.353 30.923,-18.855 30.098,-18.855 C9.2 29.402,-19.551 29.177,-19.551 28.125,-20.603 28.473,-20.951 29.439,-20.951 32.373,-23.884 32.373,-26.867 32.035,-27.204 31.748,-27.204 31.469,-27.484 30.719,-27.484 29.95,-28.253 C3.2
pads on no net: U1.1 U1.5 U1.8 U3.2 U3.6 U3.7 U4.1 U4.5 U4.8 U8.1 U8.5 U8.7 U8.8
copper on no net:
  other v2: 0,-55 35,-55

## Polygon pours and split planes (outlines as drawn)
5V on Top Layer "Top Layer-5V" (solid, remove dead copper, pour order 8): -4,9 39,9 39,-59 -4,-59
VOUT on Top Layer "Top Layer-VOUT" (solid, remove dead copper, pour order 6): 9.5,-34.163 9.5,-59 -0.5,-59 -0.5,-34.163
NetQ3_3 on Top Layer "Top Layer-NetQ3_3" (solid, remove dead copper, pour order 4): 5,-30.113 9,-30.113 9,-22.3 5,-22.3
VIN on Top Layer "Top Layer-VIN" (solid, remove dead copper, pour order 0): -4,9 39,9 39,3.5 9.455,3.5 9.5,3.455 9.5,-18.353 -4,-18.353
GND on Bottom Layer (solid, remove dead copper, pour order 10): 39,-59 39,9 -4,9 -4,-59